# Altium PCB PCB2.PcbDoc
Units mm, origin at the board's own origin, x right, y up, seen from the top; angles counter-clockwise.
Board outline 37.98 x 89 mm, 2 copper layers (Top Layer, Bottom Layer); 43 components, 51 nets, 172 pads, 0 vias.
Unrouted connection lines stored in the file: 88.
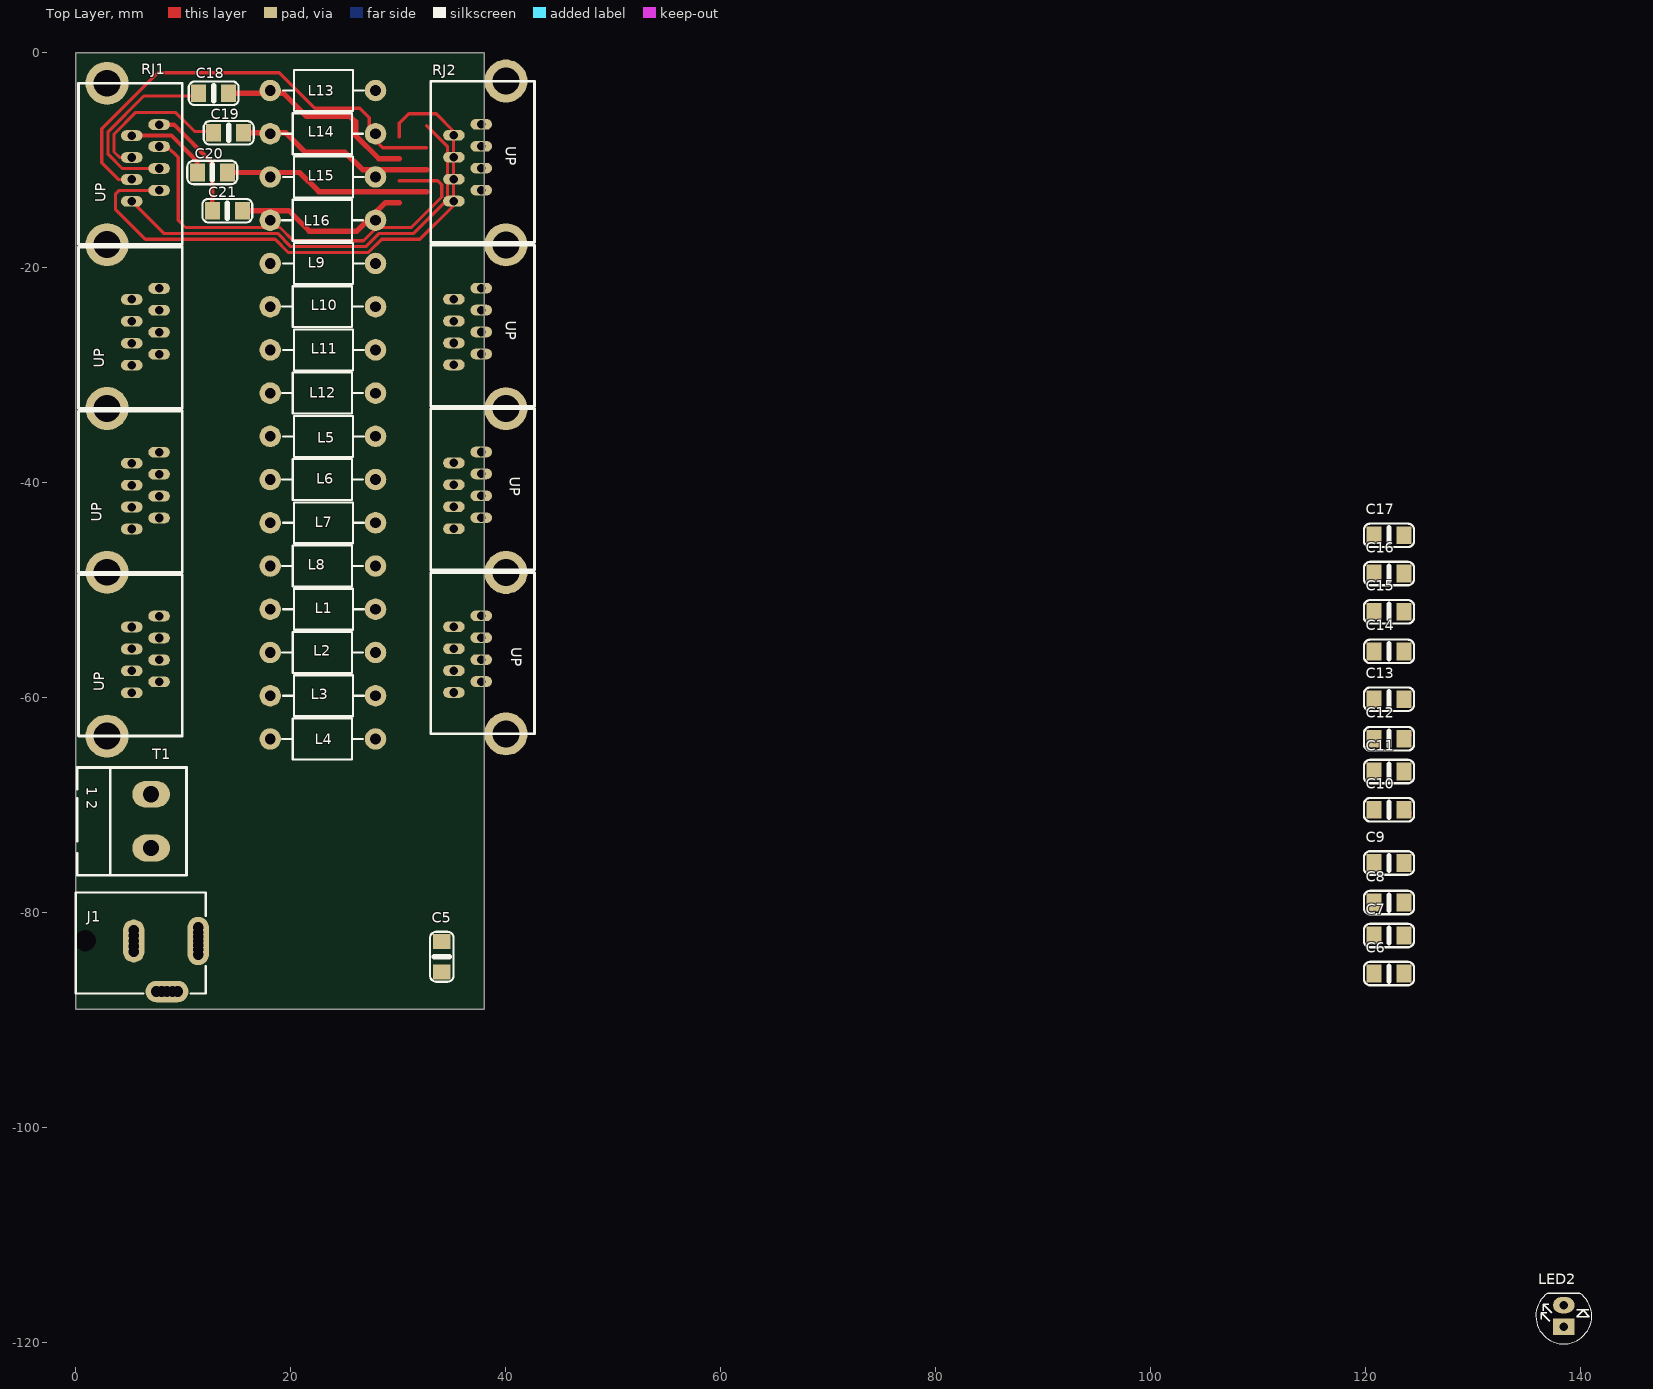
[diagram p0: Top Layer view]
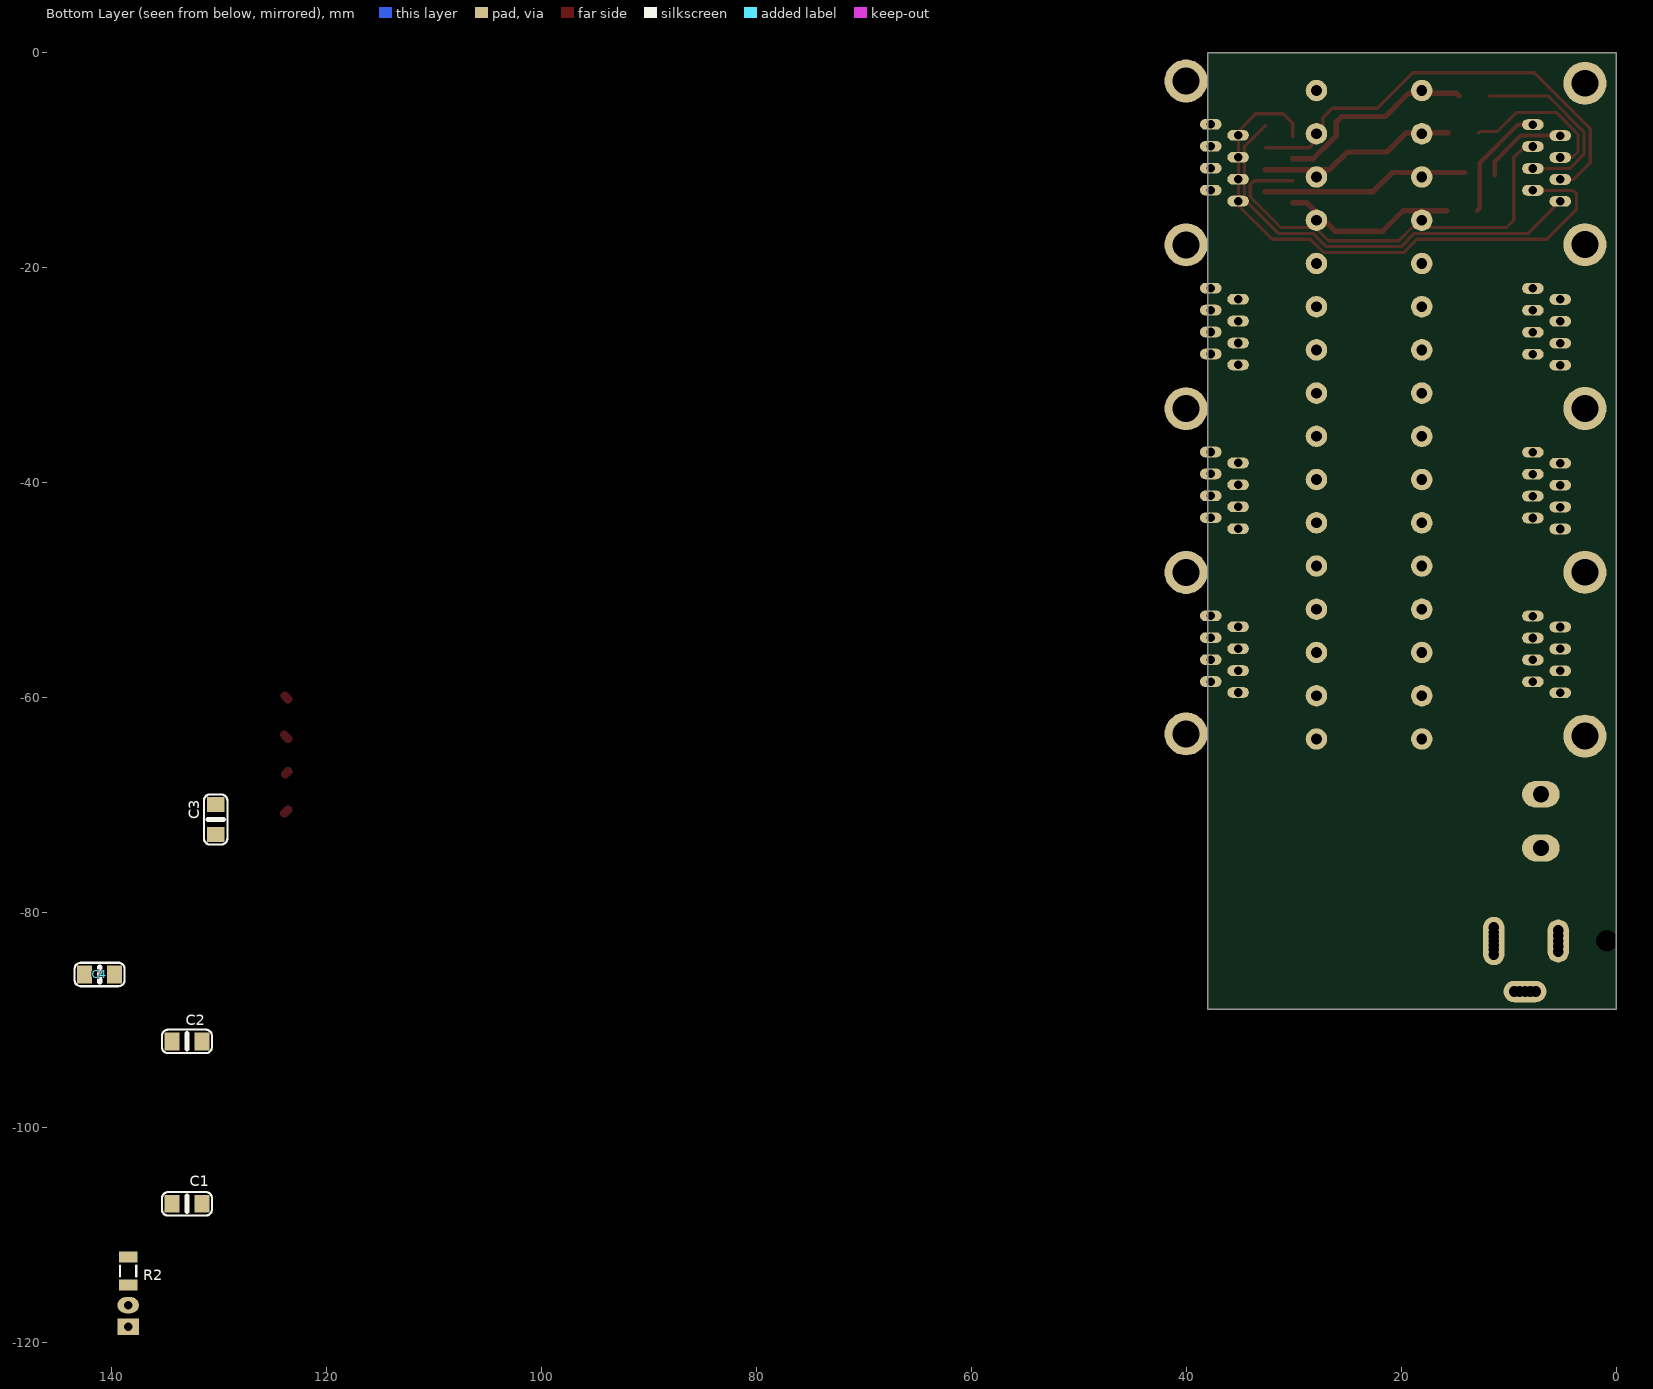
[diagram p1: Bottom Layer view, seen from below]

## Layer stack, top to bottom
Top Solder: solder mask 0.0102, Solder Resist, Dk 3.5
Top Layer: signal copper 0.0356
Dielectric 1: dielectric 0.32, FR-4, Dk 4.8
Bottom Layer: signal copper 0.0356
Bottom Solder: solder mask 0.0102, Solder Resist, Dk 3.5

## Board outline
0.019,-89.03 38,-89.03 38,-0.027 0.019,-0.027

## Design rules (kind name [scope] priority, off if disabled: settings)
Clearance [All] p1: gap=0.25 ignorepadtopadclearanceinfootprint=FALSE
PolygonConnect [All] p1: connectstyle=Relief reliefconductorwidth=0.4 reliefentries=4 polygonreliefangle="90 Angle" airgapwidth=0.254
RoutingVias [All] p1: holewidth=0.711 width=1.27 viastyle="Through Hole" minholewidth=0.711 minwidth=1.27 maxholewidth=0.711 maxwidth=1.27
SolderMaskExpansion [All] p1: expansion=0.102
Width [All] p1: maxlimit=4 minlimit=0.254 preferedwidth=1.5
30 further rules are at their usual default settings.

## Components (designator, comment, footprint, x,y, rotation, side; value= is the part's Value field where it differs from the comment)
C1 "Capacitor SMD" "1206 Capacitor" 132.969,-107.132 r180 bottom
C2 "Capacitor SMD" "1206 Capacitor" 132.969,-92.019 r180 bottom
C3 "Capacitor SMD" "1206 Capacitor" 130.302,-71.374 r90 bottom
C4 "Capacitor SMD" "1206 Capacitor" 141.097,-85.795 r180 bottom
C5 "Capacitor SMD" "1206 Capacitor" 34.055,-84.144 r90 top
C6 "Capacitor SMD" "1206 Capacitor" 122.174,-85.706 r180 top
C7 "Capacitor SMD" "1206 Capacitor" 122.174,-82.169 r180 top
C8 "Capacitor SMD" "1206 Capacitor" 122.174,-79.102 r180 top
C9 "Capacitor SMD" "1206 Capacitor" 122.174,-75.419 r180 top
C10 "Capacitor SMD" "1206 Capacitor" 122.174,-70.466 r180 top
C11 "Capacitor SMD" "1206 Capacitor" 122.174,-66.91 r180 top
C12 "Capacitor SMD" "1206 Capacitor" 122.174,-63.862 r180 top
C13 "Capacitor SMD" "1206 Capacitor" 122.174,-60.179 r180 top
C14 "Capacitor SMD" "1206 Capacitor" 122.174,-55.734 r180 top
C15 "Capacitor SMD" "1206 Capacitor" 122.174,-52.051 r180 top
C16 "Capacitor SMD" "1206 Capacitor" 122.174,-48.495 r180 top
C17 "Capacitor SMD" "1206 Capacitor" 122.174,-44.939 r180 top
C18 "Capacitor SMD" "1206 Capacitor" 12.827,-3.81 r180 top
C19 "Capacitor SMD" "1206 Capacitor" 14.224,-7.493 r180 top
C20 "Capacitor SMD" "1206 Capacitor" 12.7,-11.176 r180 top
C21 "Capacitor SMD" "1206 Capacitor" 14.097,-14.732 r180 top
J1 "Power Jack" "Power Jack" -3.111,-82.677 r0 top locked
L1 "300uH" inductor 27.813,-51.816 r270 top
L2 "300uH" inductor 18.161,-55.838 r90 top
L3 "300uH" inductor 27.813,-59.859 r270 top
L4 "300uH" inductor 18.161,-63.881 r90 top
L5 "300uH" inductor 27.813,-35.729 r270 top
L6 "300uH" inductor 18.161,-39.751 r90 top
L7 "300uH" inductor 27.813,-43.773 r270 top
L8 "300uH" inductor 18.161,-47.794 r90 top
L9 "300uH" inductor 27.813,-19.643 r270 top
L10 "300uH" inductor 18.161,-23.664 r90 top
L11 "300uH" inductor 27.813,-27.686 r270 top
L12 "300uH" inductor 18.161,-31.708 r90 top
L13 "300uH" inductor 27.813,-3.556 r270 top
L14 "300uH" inductor 18.161,-7.578 r90 top
L15 "300uH" inductor 27.813,-11.599 r270 top
L16 "300uH" inductor 18.161,-15.621 r90 top
LED2 "Red" LED-5mm 138.433,-118.562 r90 top
R2 "10k" "RES 1206 (3216X08L)" 138.433,-112.082 r270 bottom
RJ1 "" rj45-w57-4 5.207,-59.587 r90 top locked
RJ2 "" rj45-w57-4 37.719,-6.703 r270 top
T1 "Phoenix terminal" "phoenix terminal 2" -4.68,-66.532 r270 top

## Footprints (in the part's own frame and the unit in brackets; to place one, negate y for a bottom-side part, rotate by r counter-clockwise, add the part's x,y. Pads: shape width x height; smd on the part's side, far side on the other; paste and mask are expansions set on the pad)
"1206 Capacitor" [mil]
  rect 55x65 smd: 1(-55,0) 2(55,0)
  silkscreen extent -92,-43 92,43, body extent -63,-31 63,31, height 39
inductor [mm]
  round 2 hole 1: 1(0,0.074) 2(0,-9.726)
  silkscreen extent -1.9,-8.54 1.91,-1.01
LED-5mm [mm]
  rect 1.5x2 hole 0.8: 1(0,0)
  oval 1.5x2 hole 0.8: 2(2,0)
  silkscreen extent -1.6,-2.6 3.13,2.6
"phoenix terminal 2" [mm] "2 terminals"
  oval 2.5x3.5 hole 1.5: 1(2.493,11.684) 2(7.493,11.684)
  silkscreen extent 0,4.81 10.03,15
"Power Jack" [mm] "Power Adaptor Jack"
  round 1.5 hole 1: 1(14.5,-1.25) 1(14.5,-0.8) 1(14.5,-0.4) 1(14.5,0.4) 1(14.5,0.8) 1(14.5,1.25) 2(8.5,-1) 2(8.5,1) 2(8.5,-0.5) 2(8.5,0.5) 3(10.6,-4.7) 3(11.1,-4.7) 3(12.1,-4.7) 3(12.6,-4.7)
  oval 2x4.5 hole 1: 1(14.5,0)
  oval 2x4 hole 1: 2(8.5,0)
  oval 4x2 hole 1: 3(11.6,-4.7)
  round 1.9 hole 2: MH(4,0)
  silkscreen extent 3.11,-4.9 15.2,4.5, body extent 0,-4.9 15.2,4.5, height 11
"RES 1206 (3216X08L)" [mm] "Chip Resistor, 2-Leads, Body 3.2x1.6mm, IPC High Density _ (0.125 W)"
  rect 1.05x1.7 smd: 1(0,0) 2(2.596,0)
  silkscreen extent 0.8,-0.75 1.8,0.75, body extent -0.23,-0.76 2.82,0.76, height 0.6
rj45-w57-4 [mm]
  oval 1x2 hole 0.8: 1(0,0) 2(1.02,-2.54) 3(2.04,0) 4(3.06,-2.54) 5(4.08,0) 6(5.1,-2.54) 7(6.12,0) 8(7.14,-2.54) 9(15.24,0) 10(16.26,-2.54) 11(17.28,0) 12(18.3,-2.54) 13(19.32,0) 14(20.34,-2.54) 15(21.36,0) 16(22.38,-2.54) 17(30.48,0) 18(31.5,-2.54) 19(32.52,0) 20(33.54,-2.54) 21(34.56,0) 22(35.58,-2.54) 23(36.6,0) 24(37.62,-2.54) 25(45.72,0) 26(46.74,-2.54) 27(47.76,0) 28(48.78,-2.54) 29(49.8,0) 30(50.82,-2.54) 31(51.84,0) 32(52.86,-2.54)
  round 4 hole 2.5: 33(-4.03,2.3) 34(11.21,2.3) 35(26.45,2.3) 36(41.69,2.3) 37(56.706,2.3)
  silkscreen extent -4.01,-4.7 56.71,4.95

## Part data
L1 L2 L3 L4 L5 L6 L7 L8 L9 L10 L11 L12 L13 L14 L15 L16: library part "Inductor SMT"
LED2: library part LED, "LED", Adding Date=1387/12/22, Color=Red, Designer="Saeid Jorablo", Organazation=ControTec, Size="SMD 1206"
R2: library part Resistor, "Resistor", Power="1/8 W", Tolerance=5%
RJ1 RJ2: library part RJ45-w57-4
T1: library part "Phoenix terminal 2", "Terminal 2 Pin", ComponentLinkURL=www.picpars.com, Designer="Seyed Mohsen Ghasemain", E-mail=picpars@gmail.com
C1 C2 C3 C4 C5 C6 C7 C8 C9 C10 C11 C12 C13 C14 C15 C16 C17 C18 C19 C20 C21: =100nF
J1: Adding Date=10/21/2009, Company=Personal, Designer="Saeid Jorablo", Project Name=Laser

## Nets (pads, with @x,y where several pads share a name; then routed paths per layer and width w, separated by ;. In a path a pad name is that pad's centre, name@x,y a point inside that pad or via, vN(x,y) a via of type N, cw(c..) or ccw(c..) an arc to the next point about the centre after c; other vN are vias at no path point)
GND: C1.1 C2.1 C3.1 C4.1 C5.1 J1.2 J1.3 L1.1 L2.1 L5.1 L6.1 L9.1 L10.1 L13.1 L14.1 R2.1 T1.2
NetLED2_2: LED2.2 R2.2
RX+p1: RJ1.27 RJ2.3 | length 42.8
  Top Layer w0.3: RJ1.27 3.953,-11.827 2.413,-10.287 2.413,-7.112 7.62,-1.905 18.923,-1.905 22.228,-5.21 24.784,-5.21 24.787,-5.207 26.416,-5.207 27.305,-6.096 27.305,-7.62 28.567,-8.882 32.639,-8.882
RX+p2: RJ1.19 RJ2.11
RX+p3: RJ1.11 RJ2.19
RX+p4: RJ1.3 RJ2.27
RX-p1: RJ1.30 RJ2.6 | length 40.3
  Top Layer w0.3: RJ1.30 8.513,-8.767 9.525,-9.779 9.525,-15.621 10.203,-16.299 18.998,-16.299 20.225,-17.526 26.765,-17.526 27.992,-16.299 31.199,-16.299 34.039,-13.459 34.039,-12.322 33.659,-11.942 30.099,-11.942
RX-p2: RJ1.22 RJ2.14
RX-p3: RJ1.14 RJ2.22
RX-p4: RJ1.6 RJ2.30
TX+p1: RJ1.25 RJ2.1 | length 40.6
  Top Layer w0.3: RJ1.25 8.189,-16.849 18.77,-16.849 19.997,-18.076 26.993,-18.076 28.22,-16.849 31.427,-16.849 34.589,-13.687 34.589,-8.792 32.639,-6.842
TX+p2: RJ1.17 RJ2.9
TX+p3: RJ1.9 RJ2.17
TX+p4: RJ1.1 RJ2.25
TX-p1: RJ1.26 RJ2.2 | length 54.8
  Top Layer w0.3: RJ1.26 4.044,-12.847 3.683,-13.208 3.683,-14.605 6.477,-17.399 18.542,-17.399 19.769,-18.626 27.221,-18.626 28.448,-17.399 32.004,-17.399 35.139,-14.264 35.139,-7.326 33.528,-5.715 30.988,-5.715 30.099,-6.604 30.099,-7.862
TX-p2: RJ1.18 RJ2.10
TX-p3: RJ1.10 RJ2.18
TX-p4: RJ1.2 RJ2.26
TXRxC+p1: C18.2 RJ1.28 | length 17.6
  Top Layer w0.3: RJ1.28 4.314,-10.807 3.006,-9.499 3.006,-7.392 6.334,-4.064 C18.2@11.811,-4.064
TXRxC+p2: C14.2 RJ1.20 RJ2.12 | length 0.2
  Top Layer w0.3: RJ1.20 RJ1.20@7.905,-26.047
TXRxC+p3: C10.2 RJ1.12 | length 0.7
  Top Layer w0.3: RJ1.12 RJ1.12@8.413,-41.287
TXRxC+p4: C6.2 RJ1.4 | length 0.7
  Top Layer w0.3: RJ1.4 RJ1.4@8.413,-56.527
TXRxC+pe1: C18.1 L13.2 RJ2.4 | length 19.2
  Top Layer w0.5: C18.1@14.605,-4.064 14.859,-3.81 L13.2@18.13,-3.81 ; L13.2@17.876,-4.064 L13.2@18.13,-3.81 ; 30.099,-9.902 28.19,-9.902 26.035,-7.747 26.035,-6.477 25.527,-5.969 21.463,-5.969 19.304,-3.81 L13.2@18.13,-3.81
TXRxC+pe2: C14.1 L9.2
TXRxC+pe3: C10.1 L5.2 RJ2.20 | length 0.5
  Top Layer w0.8: C10.1 C10.1@123.891,-70.786
TXRxC+pe4: C6.1 L1.2 RJ2.28
TXRxC-p1: C19.2 RJ1.29 | length 14.4
  Top Layer w0.3: RJ1.29 4.072,-9.787 3.556,-9.271 3.556,-7.62 5.588,-5.588 9.271,-5.588 11.049,-7.366 12.7,-7.366 C19.2
TXRxC-p2: C15.2 RJ1.21
TXRxC-p3: C11.2 RJ1.13
TXRxC-p4: C7.2 RJ1.5
TXRxC-pe1: C19.1 L14.2 RJ2.5 | length 18.4
  Top Layer w0.5: C19.1 18.056,-7.493 19.558,-7.493 21.336,-9.271 25.019,-9.271 26.67,-10.922 32.639,-10.922
TXRxC-pe2: C15.1 L10.2 RJ2.13
TXRxC-pe3: C11.1 L6.2 RJ2.21 | length 0.3
  Top Layer w0.8: C11.1 C11.1@123.808,-67.147
TXRxC-pe4: C7.1 L2.2 RJ2.29
TXRxD+p1: C20.2 RJ1.31 | length 8.4
  Top Layer w0.4: RJ1.31 8.89,-7.747 11.303,-10.16 C20.2 C20.2@11.303,-11.43
TXRxD+p2: C16.2 RJ1.23
TXRxD+p3: C12.2 RJ1.15
TXRxD+p4: C8.2 RJ1.7
TXRxD+pe1: C20.1 L15.2 RJ2.7 | length 19.3
  Top Layer w0.5: C20.1 18.034,-11.176 20.828,-11.176 22.614,-12.962 32.639,-12.962
TXRxD+pe2: C16.1 L11.2 RJ2.15
TXRxD+pe3: C12.1 L7.2 RJ2.23 | length 0.5
  Top Layer w0.8: C12.1 C12.1@123.925,-63.508
TXRxD+pe4: C8.1 L3.2 RJ2.31
TXRxD-p1: C21.2 RJ1.32 | length 11
  Top Layer w0.4: RJ1.32 9.14,-6.727 12.7,-10.287 12.7,-14.478 C21.2@12.954,-14.732
TXRxD-p2: C17.2 RJ1.24
TXRxD-p3: C13.2 RJ1.16
TXRxD-p4: C9.2 RJ1.8
TXRxD-pe1: C21.1 L16.2 RJ2.8 | length 16.2
  Top Layer w0.5: C21.1@15.748,-14.732 19.812,-14.732 21.717,-16.637 26.162,-16.637 28.817,-13.982 30.099,-13.982
TXRxD-pe2: C17.1 L12.2 RJ2.16
TXRxD-pe3: C13.1 L8.2 RJ2.24 | length 0.4
  Top Layer w0.8: C13.1 C13.1@123.882,-59.868
TXRxD-pe4: C9.1 L4.2 RJ2.32
VCC: C1.2 C2.2 C3.2 C4.2 C5.2 J1.1 L3.1 L4.1 L7.1 L8.1 L11.1 L12.1 L15.1 L16.1 LED2.1 T1.1
pads on no net: J1.MH RJ1.33 RJ1.34 RJ1.35 RJ1.36 RJ1.37 RJ2.33 RJ2.34 RJ2.35 RJ2.36 RJ2.37

## Silkscreen, mask and mechanical layers (free items; w line width, h text height)
Mechanical 1:
  the board outline again, w0.254

## Text inside footprints (layer, text, board x,y; h text height)
RJ1: Top Overlay "UP" at 2.667,-59.436 h1 r90; Top Overlay "UP" at 2.413,-43.688 h1 r90; Top Overlay "UP" at 2.667,-29.337 h1 r90; Top Overlay "UP" at 2.794,-13.97 h1 r90
RJ2: Top Overlay "UP" at 40.005,-8.735 h1 r270; Top Overlay "UP" at 40.005,-24.991 h1 r270; Top Overlay "UP" at 40.386,-39.469 h1 r270; Top Overlay "UP" at 40.513,-55.344 h1 r270
T1: Top Overlay "1 2" at 1.016,-68.326 h1 r270